# Altium PCB 1025-one-2.PcbDoc
Units mil, origin at the board's own origin, x right, y up, seen from the top; angles counter-clockwise.
Board outline 964.57 x 3647.49 mil, 2 copper layers (Top Layer, Bottom Layer); 23 components, 51 nets, 77 pads, 21 vias.
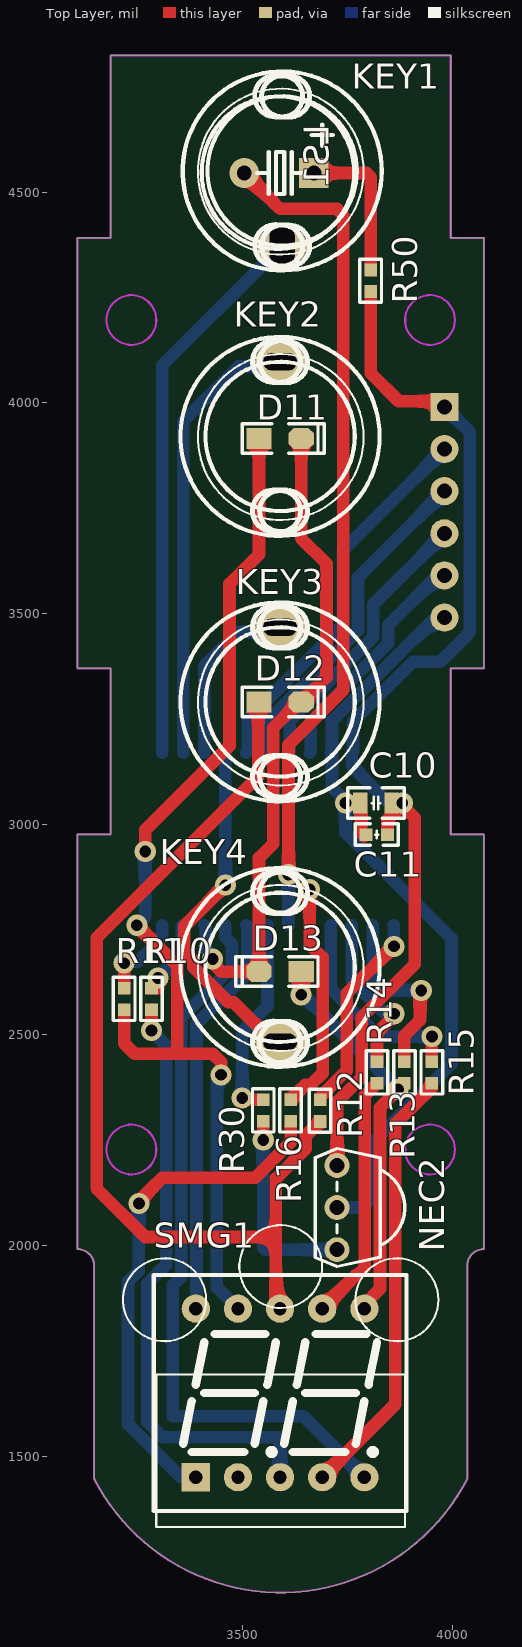
[diagram p0: Top Layer view]
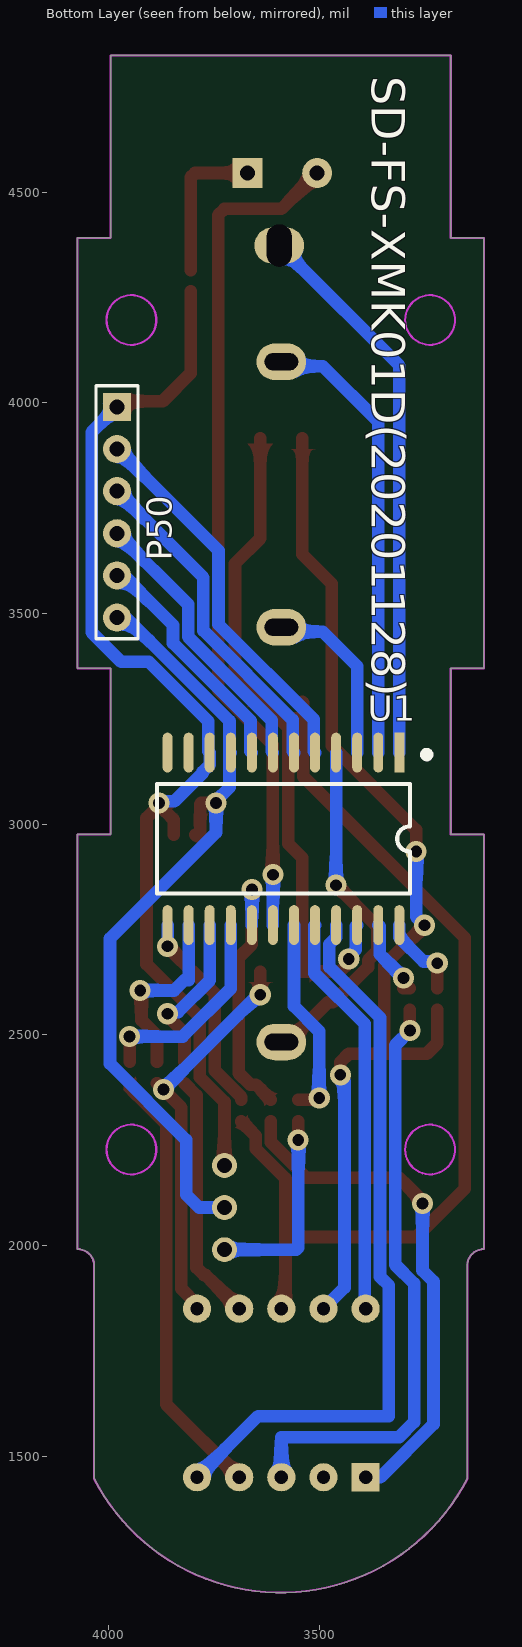
[diagram p1: Bottom Layer view, seen from below]

## Layer stack, top to bottom
Top Solder: solder mask 0.4, Solder Resist, Dk 3.5
Top Layer: signal copper 1.4
Dielectric 1: dielectric 12.6, FR-4, Dk 4.8
Bottom Layer: signal copper 1.4
Bottom Solder: solder mask 0.4, Solder Resist, Dk 3.5

## Board outline
3148.59,1446.63 3148.59,1952.1 ccw(c3109.22,1952.1) 3109.22,1991.47 3109.22,2975.72 3187.96,2975.72 3187.96,3369.42 3109.22,3369.42 3109.22,4390.9 3187.96,4390.9 3187.96,4823.97 3995.05,4823.97 3995.05,4390.9 4073.79,4390.9 4073.79,3369.42 3995.05,3369.42 3995.05,2975.72 4073.79,2975.72 4073.79,1991.47 ccw(c4073.79,1952.1) 4034.42,1952.1 4034.42,1446.63 cw(c3591.51,1674.37)

## Design rules (kind name [scope] priority, off if disabled: settings)
Clearance [All] p1: gap=6 ignorepadtopadclearanceinfootprint=FALSE
ComponentClearance [All] p1 off: gap=0 collisioncheckmode=3 verticalgap=100000 showdistances=FALSE
Height [All] p1: minheight=0 maxheight=1000 prefheight=1
HoleSize [All] p1: absolutevalues=TRUE maxlimit=100 minlimit=12 maxpercent=80.000 minpercent=20.000
PolygonConnect [All] p1: connectstyle=Relief reliefconductorwidth=10 reliefentries=4 polygonreliefangle="90 Angle" airgapwidth=10
RoutingVias [All] p1: holewidth=28 width=50 viastyle="Through Hole" minholewidth=28 minwidth=50 maxholewidth=28 maxwidth=50
SilkToSilkClearance [All] p1: silktosilkclearance=0
SilkToSolderMaskClearance [IsPad] p1: minsilkscreentomaskgap=0 clearancetoexposedcopper=TRUE
SolderMaskExpansion [All] p1: expansion=4
Width [All] p1: maxlimit=50 minlimit=15 preferedwidth=30
25 further rules are at their usual default settings.

## Components (designator, comment, footprint, x,y, rotation, side; value= is the part's Value field where it differs from the comment)
C10 "Cap" "C 0805_L" 3817.6,3050 r0 top value=10uF
C11 "Cap" "C 0603_L" 3819.41,2975 r0 top value=0.1uF
D11 "LED0" "LED 0805W" 3590,3915 r0 top
D12 "LED0" "LED 0805W" 3590,3290 r0 top
D13 "LED0" "LED 0805W" 3590,2650 r180 top
KEY1 "TOUCH" KEY-T9-2#1 3595,4550 r180 top
KEY2 "TOUCH" KEY-T9-2#2 3590,3920 r0 top
KEY3 "TOUCH" KEY-T9-2#2 3590,3290 r0 top
KEY4 "TOUCH" KEY-T9-2#2 3590,2660 r180 top
LS1 "Speaker" "BEEP 4x9x5.5" 3590,4545 r90 top
NEC2 "JSI838" HS0038B 3725,2090 r90 top
P50 "主板电源接口" HDR2.54-LI-6P 3980,3740 r270 bottom
R10 "Res2" "R 0603_L" 3285,2585 r90 top value=201
R11 "Res2" "R 0603_L" 3220,2585 r90 top value=201
R12 "Res2" "R 0603_L" 3685,2320 r90 top value=201
R13 "Res2" "R 0603_L" 3885,2410.59 r90 top value=201
R14 "Res2" "R 0603_L" 3820,2410.59 r90 top value=201
R15 "Res2" "R 0603_L" 3950,2410.59 r90 top value=201
R16 "Res2" "R 0603_L" 3615,2320.59 r90 top value=201
R30 "Res2" "R 0603_L" 3550,2320.59 r90 top value=1K
R50 "Res2" "R 0603_L" 3805,4289.41 r270 top value=4.7K
SMG1 "3621A" "SMG 0.36-2P" 3590,1650 r0 top
U1 "YX23F01CB_24" SOP24_M 3585,2965 r270 bottom

## Footprints (in the part's own frame and the unit in brackets; to place one, negate y for a bottom-side part, rotate by r counter-clockwise, add the part's x,y. Pads: shape width x height; smd on the part's side, far side on the other; paste and mask are expansions set on the pad)
"BEEP 4x9x5.5" [mm] "4*9*5.5mm(脚距,直径,高度)"
  rect 1.8x1.8 hole 0.9: 1(0,-2.032)
  round 1.8 hole 0.9: 2(0,2.159)
  silkscreen extent -4.57,-4.47 4.62,4.73, body extent -4.5,-4.5 4.5,4.5, height 5.45
"C 0603_L" [mil] "无极性贴片电容"
  rect 30x30 smd: 1(-25.59,0) 2(25.59,0)
  silkscreen extent -51,-26 51,26, body extent -31,-16 31,16, height 32
"C 0805_L" [mil] "无极性贴片电容                    @sucaita.com 素材塔"
  rect 35x50 smd: 1(-37.4,0) 2(37.4,0)
  silkscreen extent -67,-36 67,36, body extent -39,-24 39,24, height 20
HDR2.54-LI-6P [mm] "排针，6脚"
  rect 1.7x1.7 hole 0.9: 1(-6.35,0)
  round 1.7 hole 0.9: 2(-3.81,0) 3(-1.27,0) 4(1.27,0) 5(3.81,0) 6(6.35,0)
  silkscreen extent -7.62,-1.27 7.62,1.27, body extent -7.62,-1.27 7.62,1.27, height 8.5
HS0038B [mm] "红外接收头"
  round 1.5 hole 0.9: 1(-2.54,0) 2(0,0) 3(2.54,0)
  silkscreen extent -3.56,-4.08 3.56,1.3
KEY-T9-2#1 [mm]
  oval 3x2.2 hole 1.524 slot 2.54 at 90 deg: 1(0,4.5)
  silkscreen extent -6,-6 6,6
KEY-T9-2#2 [mm]
  oval 3x2.2 hole 2.032 slot 1.016 at 90 deg: 1(0,4.5)
  silkscreen extent -6,-6 6,6
"LED 0805W" [mil] "白色0805LED                    @sucaita.com 素材塔"
  rect 60x50 smd: 1(-50,0)
  oct 60x50 smd: 2(50,0)
  silkscreen extent -90,-35 105,35, body extent -39,-25 39,25, height 32
"R 0603_L" [mil] "1/10W贴片电阻"
  rect 30x30 smd: 1(-25.59,0) 2(25.59,0)
  silkscreen extent -51,-26 51,26, body extent -31,-16 32,16, height 16
"SMG 0.36-2P" [mm] "15*14*7.2mm(长宽厚)"
  rect 1.7x1.7 hole 0.8: 1(-5.08,-5.08)
  round 1.7 hole 0.8: 2(-2.54,-5.08) 3(0,-5.08) 4(2.54,-5.08) 5(5.08,-5.08) 6(5.08,5.08) 7(2.54,5.08) 8(0,5.08) 9(-2.54,5.08) 10(-5.08,5.08)
  silkscreen extent -7.62,-7.11 7.62,7.11, body extent -7.5,-7 7.5,7, height 7.2
SOP24_M [mm] "15.4*10.6*2.6mm（长宽高）"
  rect 2.4x0.6 smd: 1(-5.2,6.985)
  oval 2.4x0.6 smd: 2(-5.2,5.715) 3(-5.2,4.445) 4(-5.2,3.175) 5(-5.2,1.905) 6(-5.2,0.635) 7(-5.2,-0.635) 8(-5.2,-1.905) 9(-5.2,-3.175) 10(-5.2,-4.445) 11(-5.2,-5.715) 12(-5.2,-6.985) 13(5.2,-6.985) 14(5.2,-5.715) 15(5.2,-4.445) 16(5.2,-3.175) 17(5.2,-1.905) 18(5.2,-0.635) 19(5.2,0.635) 20(5.2,1.905) 21(5.2,3.175) 22(5.2,4.445) 23(5.2,5.715) 24(5.2,6.985)
  silkscreen extent -5.23,-7.62 3.3,8.79, body extent -5.15,-7.7 5.15,7.7, height 2.7

## Part data
C10 C11: "Capacitor", LatestRevisionDate=17-Jul-2002, LatestRevisionNote="Re-released for DXP Platform.", PackageDescription="Radial Cap, Thru-Hole; 2 Leads; 0.3 in Pin Spacing", PackageReference=RAD-0.3, Published=8-Jun-2000, Publisher="Altium Limited"
D11 D12 D13: "Typical INFRARED GaAs LED", LatestRevisionDate=08-Jul-2005, LatestRevisionNote="Mech Layer 1 removed.", PackageDescription="LED; 2 Leads", PackageReference=LED-0, Published=8-Jun-2000, Publisher="Altium Limited"
KEY1 KEY2 KEY3 KEY4: "触摸弹簧"
LS1: "Loudspeaker", LatestRevisionDate=17-Jul-2002, LatestRevisionNote="Re-released for DXP Platform.", PackageReference=PIN2, Published=24-Mar-1999, Publisher="Altium Limited"
NEC2: library part HS0038, "红外接收器"
P50: library part "Header 6", "Header, 6-Pin", LatestRevisionDate=17-Jul-2002, LatestRevisionNote="Re-released for DXP Platform.", Publisher="Altium Limited"
R10 R11 R12 R13 R14 R15 R16 R30 R50: "Resistor", LatestRevisionDate=17-Jul-2002, LatestRevisionNote="Re-released for DXP Platform.", PackageDescription="Axial Device, Thru-Hole; 2 Leads; 0.4 in Pin Spacing", PackageReference=AXIAL-0.4, Published=8-Jun-2000, Publisher="Altium Limited"
SMG1: "0.36寸2位共阴数码管"
U1: "主控MCU"

## Via types
v1: diameter 50, hole 28, Top Layer to Bottom Layer, 21 vias

## Nets (pads, with @x,y where several pads share a name; then routed paths per layer and width w, separated by ;. In a path a pad name is that pad's centre, name@x,y a point inside that pad or via, vN(x,y) a via of type N, cw(c..) or ccw(c..) an arc to the next point about the centre after c; other vN are vias at no path point)
220VAC: 
A: R10.2 U1.23 | length 165.3
  Top Layer w30: R10.2 v1@3300.18,2610.59
  Bottom Layer w30: v1(3300,2635) 3356.81,2691.81 3356.81,2757.09 U1.23
B: R11.2 U1.24 | length 203.8
  Top Layer w30: R11.2 v1(3220,2670)
  Bottom Layer w30: v1(3220,2670) 3223.83,2673.83 3252.6,2673.83 3310,2731.22 U1.24
C: R12.2 U1.13 | length 487.2
  Top Layer w30: R12.2 3685,2351.83 3748,2414.82 3748,2598 v1(3860,2710)
  Bottom Layer w30: v1(3860,2710) U1.13
COM1: SMG1.10 U1.20 | length 961.6
  Bottom Layer w30: SMG1.10 3391.73,1851.73 3391.73,2525.77 3512,2646.03 3512,2758.27 U1.20
COM2: SMG1.5 U1.21 | length 1745.4
  Bottom Layer w30: U1.21 3460,2731.22 3476,2715.22 3476,2660.95 3355.73,2540.68 3355.73,1925.73 3335,1905 3335,1595 3645,1595 SMG1.5
D: R13.2 U1.14 | length 441
  Top Layer w30: R13.2 3885,2497.88 3922.12,2535 3922.12,2602.12 v1(3925,2605)
  Bottom Layer w30: U1.14 3810,2630 3819.59,2630 3844.59,2605 v1(3925,2605)
DP/NTC: LS1.2 U1.18 | length 2015
  Top Layer w30: LS1.2 3590,4460 3725,4460 3740,4445 3740,3317.8 3610,3187.8 v1(3610,2880)
  Bottom Layer w30: U1.18 v1(3610,2880)
DW1: P50.2 U1.5 | length 915
  Bottom Layer w30: U1.5 3513.19,3172.91 3513.19,3248.19 3739,3474 3739,3649 P50.2
DW2: P50.3 U1.6 | length 794.2
  Bottom Layer w30: U1.6 3563.19,3172.91 3563.19,3247.28 3775,3459.09 3775,3585 P50.3
DW3: P50.4 U1.7 | length 673.5
  Bottom Layer w30: U1.7 3613.19,3172.91 3613.19,3246.36 3811,3444.18 3811,3521 P50.4
E: R14.2 U1.15 | length 394.3
  Top Layer w30: R14.2 3820,2504.59 3860,2544.59 v1(3860,2550)
  Bottom Layer w30: U1.15 3760,2629.09 3835.26,2553.83 3856.17,2553.83 v1(3860,2550)
F: R15.2 U1.16 | length 498
  Top Layer w30: R15.2 3950,2495 v1(3950.62,2495.62)
  Bottom Layer w30: U1.16 3710,2610 3824.38,2495.62 v1(3950.62,2495.62)
G: R16.2 U1.17 | length 635.7
  Top Layer w30: R16.2 3650.41,2381.59 3663.85,2381.59 3691,2408.73 3691,2683.7 3660,2714.7 v1(3660,2845)
  Bottom Layer w30: U1.17 v1(3660,2845)
GND: C10.1 C11.1 NEC2.2 P50.6 U1.9 | length 1914.2
  Top Layer w30: v1(3745,3050) C10.1 3782.7,3047.5 3782.7,2980 3790,2972.7 3790,2971.18 C11.1
  Bottom Layer w30: NEC2.2 3785,2090 3815.88,2120.88 3815.88,2250.83 3996.62,2431.57 3996.62,2728.38 3745,2980 v1(3745,3050) 3745,3055.41 3713.19,3087.22 3713.19,3166.54 U1.9 3713.19,3172.91 3713.19,3244.54 3958.65,3490 P50.6
LED_A: R10.1 SMG1.3 | length 1436.3
  Top Layer w30: v1(3285,2510) R10.1
  Bottom Layer w30: v1(3285,2510) 3319.73,2475.27 3319.73,1954.4 3275,1909.66 3275,1580.91 3310.91,1545 3590,1545 SMG1.3
LED_B: D11.1 R11.1 SMG1.9 | length 2561.5
  Top Layer w30: R11.1 3220,2480 3245,2455 3355,2455 ; v1(3250,2760) 3346,2664 3346,2464 3355,2455 ; v1(3270,2935) 3270,2985.91 3470,3185.91 3470,3570 3540,3640 D11.1 ; v1(3450,2405) 3450,2435 3430,2455 3355,2455
  Bottom Layer w30: v1(3250,2760) 3270,2780 v1(3270,2935) ; v1(3450,2405) 3450,2399.59 3440,2389.59 3440,1900 SMG1.9
LED_C: D12.1 R12.1 SMG1.8 | length 2279.5
  Top Layer w30: D12.1 3538,3288 3538,3113.05 3154.62,2729.67 3154.62,2135.33 3269.95,2020 3580,2020 ; SMG1.8 3580,1860 3580,2020 ; R12.1 3651,2260.4 3651,2230.09 3580,2159.09 3580,2020
LED_D: D13.1 R13.1 SMG1.6 | length 952.5
  Top Layer w30: v1(3640,2595) D13.1 ; SMG1.6 3790,1859.99 3827.28,1897.28 3827.28,2327.28 v1(3870,2370) R13.1
  Bottom Layer w30: v1(3640,2595) 3645,2595 v1(3870,2370)
LED_DP: SMG1.2
LED_E: R14.1 SMG1.7 | length 591
  Top Layer w30: SMG1.7 3770,1930 3773.71,1930 3791.28,1947.57 3791.28,2356.28 R14.1
LED_F: R15.1 SMG1.4 | length 1044.7
  Top Layer w30: SMG1.4 3863.28,1623.28 3863.28,2288.28 3950,2375 R15.1
  Bottom Layer w30: SMG1.4 SMG1.4@3692.04,1450
LED_G: R16.1 SMG1.1 | length 1221.2
  Top Layer w30: v1(3255,2100) 3255,2105.41 3310,2160.41 3530.41,2160.41 3615,2245 R16.1
  Bottom Layer w30: v1(3255,2100) 3255,1940.58 3229,1914.58 3229,1576 3355,1450 SMG1.1
NEC_R: R30.2 U1.19 | length 486.7
  Top Layer w30: v1(3500,2350) 3503.82,2346.18 R30.2
  Bottom Layer w30: v1(3500,2350) 3500,2508.11 3560,2568.11 U1.19
NetC2_1: 
NetC3_1: 
NetC5_1: 
NetC5_2: 
NetD1_K: 
NetF2_1: 
NetLS1_1: LS1.1 R50.1 | length 359.1
  Top Layer w30: LS1.1 3795,4545 3805,4535 R50.1
NetNEC2_1: NEC2.1 R30.1 | length 492.1
  Top Layer w30: v1(3550,2250) R30.1
  Bottom Layer w30: v1(3550,2250) 3550,1995 3555,1990 NEC2.1@3740,1990
NetP01_1: 
NetP01_2: 
NetP01_3: 
NetP01_4: 
NetQ1_3: 
NetQ2_3: 
NetQ3_3: 
NetQ4_3: 
NetR2_1: 
NetR2_2: 
TOUCH1: KEY1.1 U1.1 | length 1321.4
  Bottom Layer w30: U1.1 3310,4087.83 3568.42,4346.25 3568.42,4346.68 3594.57,4372.83 KEY1.1
TOUCH2: KEY2.1 U1.2 | length 1074.2
  Bottom Layer w30: U1.2 3360,3955 3491.33,4086.33 3579.17,4086.33 KEY2.1
TOUCH3: KEY3.1 U1.3 | length 423.5
  Bottom Layer w30: U1.3 3410,3375 3491.33,3456.33 3579.17,3456.33 KEY3.1
TOUCH4: KEY4.1 U1.4 | length 837.8
  Top Layer w30: v1(3460,2855) 3362.53,2757.53 3362.53,2698.38 3384,2676.91 3384,2660.95 3467.64,2577.31 3479.78,2577.31 3574.25,2482.83 KEY4.1
  Bottom Layer w30: v1(3460,2855) U1.4
TOUCH_LED_COM: D11.2 D12.2 D13.2 U1.22 | length 1576.4
  Top Layer w30: v1(3430,2680) 3430,2670.41 3450.41,2650 D13.2 3540,2920 3574,2954 3574,3229 3635,3290 D12.2 3641.29,3290 3700,3348.71 3700,3617.94 3640,3677.94 D11.2
  Bottom Layer w30: U1.22 3413.19,2757.09 3413.19,2702.22 3430,2685.41 v1(3430,2680)
UART_RX: U1.12
UART_TX: U1.11
VCC: C10.2 C11.2 NEC2.3 P50.1 R50.2 U1.10 | length 2647.8
  Top Layer w30: NEC2.3 3725,2340.91 3784,2399.91 3784,2541.79 3910,2667.79 3910,3014.59 v1@3880,3044.59 ; R50.2 3805,4070 3871.54,4003.46 3966.54,4003.46 P50.1 ; C11.2 3845,3009.59 v1@3880,3044.59 ; C10.2 v1(3880,3050) v1@3880,3044.59
  Bottom Layer w30: v1(3880,3050) 3876.17,3053.83 3844.06,3053.83 3777.19,3120.7 3777.19,3123.48 3760,3140.67 U1.10 3763.19,3172.91 3763.19,3243.63 3904.56,3385 3970,3385 4040,3455 4040,3930 P50.1
YAOTOU: P50.5 U1.8 | length 561.6
  Bottom Layer w30: U1.8 3663.19,3172.91 3663.19,3245.45 3847,3429.27 3847,3472 3964,3589 3979,3589 P50.5

## Keep-outs
Keep-Out Layer:
  circle w5: c3237.18,2227.69 r59.06
  circle w5: c3237.18,4196.2 r59.06
  circle w5: c3945.84,4196.2 r59.06
  circle w5: c3945.84,2227.69 r59.06
  lines w5: 3109.22,1991.47 cw(c3109.22,1952.1) 3148.59,1952.1 3148.59,1446.63 ccw(c3591.51,1674.37) 4034.42,1446.63 4034.42,1952.1 cw(c4073.79,1952.1) 4073.79,1991.47 4073.79,2975.72 3995.05,2975.72 3995.05,3369.42 4073.79,3369.42 4073.79,4390.9 3995.05,4390.9 3995.05,4823.97 3187.96,4823.97 3187.96,4390.9 3109.22,4390.9 3109.22,3369.42 3187.96,3369.42 3187.96,2975.72 3109.22,2975.72 3109.22,1991.47

## Silkscreen, mask and mechanical layers (free items; w line width, h text height)
Top Overlay:
  circle w5: c3591.51,1949.96 r98.43
  circle w5: c3315.92,1871.22 r98.43
  circle w5: c3867.1,1871.22 r98.43
  circle w5: c3591.51,2658.62 r196.85
  circle w5: c3591.51,3288.54 r196.85
  circle w5: c3591.51,3918.46 r196.85
  circle w5: c3591.51,4548.38 r196.85
  lines w5: 3296.23,1331.85 3886.78,1331.85 3886.78,1694.05 3296.23,1694.05 3296.23,1331.85
Bottom Overlay:
  text "SD-FS-XMK01D(20201128)" at 3375,4775 h80 r90